# Altium PCB TSAL_REV2_2.PcbDoc
Units mil, origin at the board's own origin, x right, y up, seen from the top; angles counter-clockwise.
Board outline 2559.06 x 1377.95 mil, 2 copper layers (Top Layer, Bottom Layer); 30 components, 14 nets, 62 pads, 23 vias.
Unrouted connection lines stored in the file: 41.
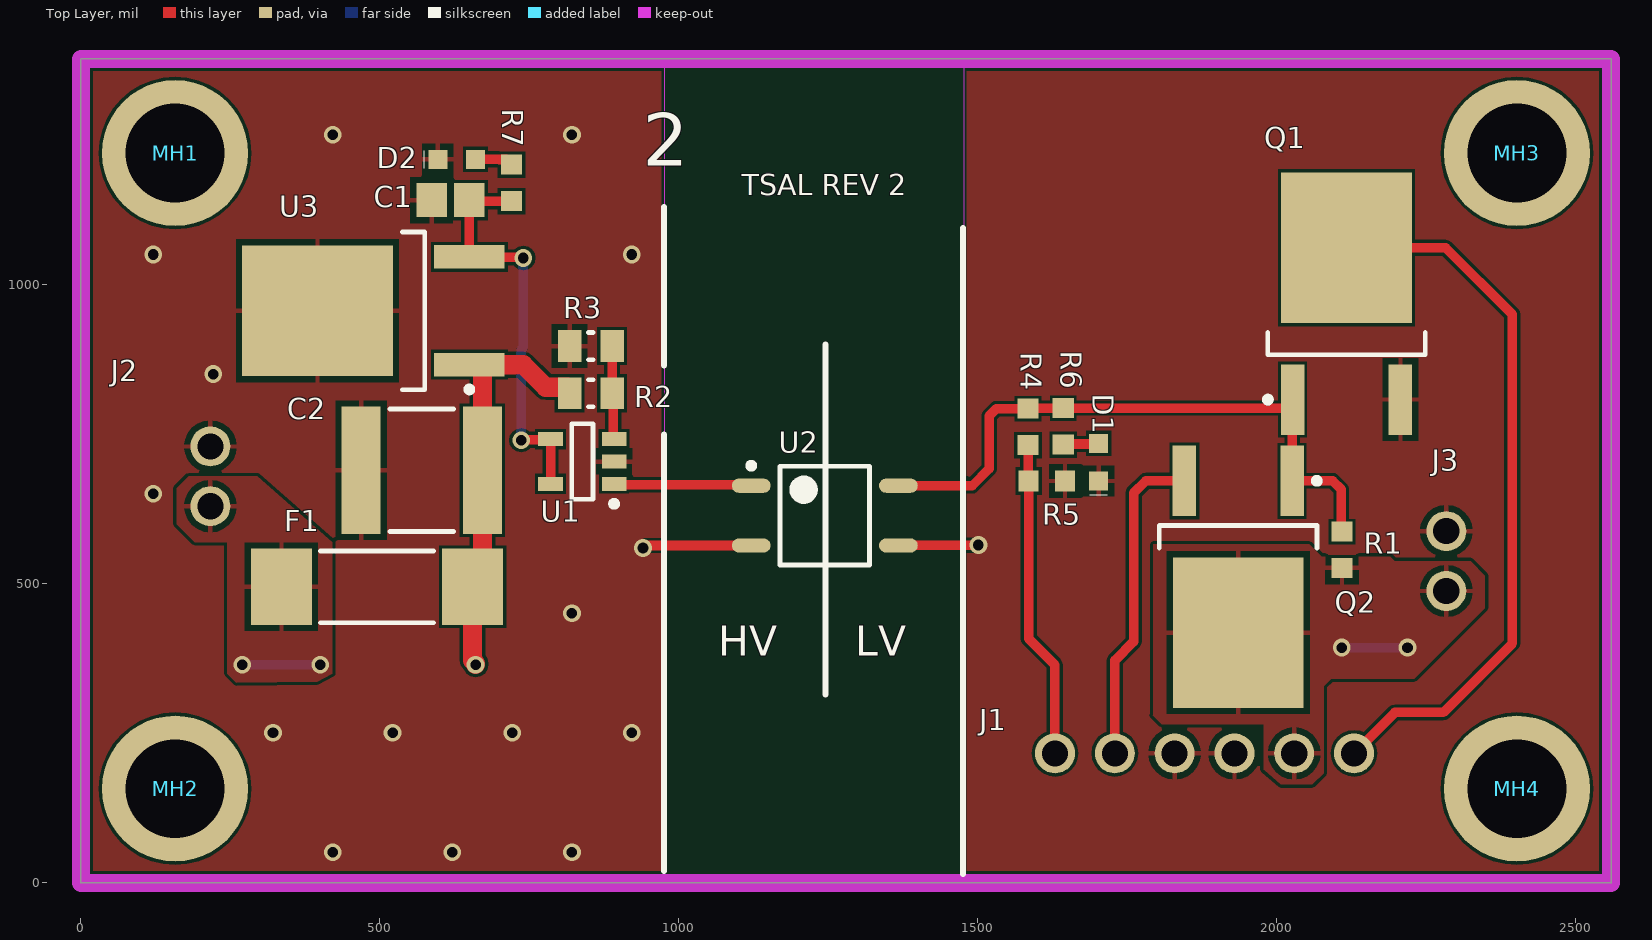
[diagram p0: Top Layer view]
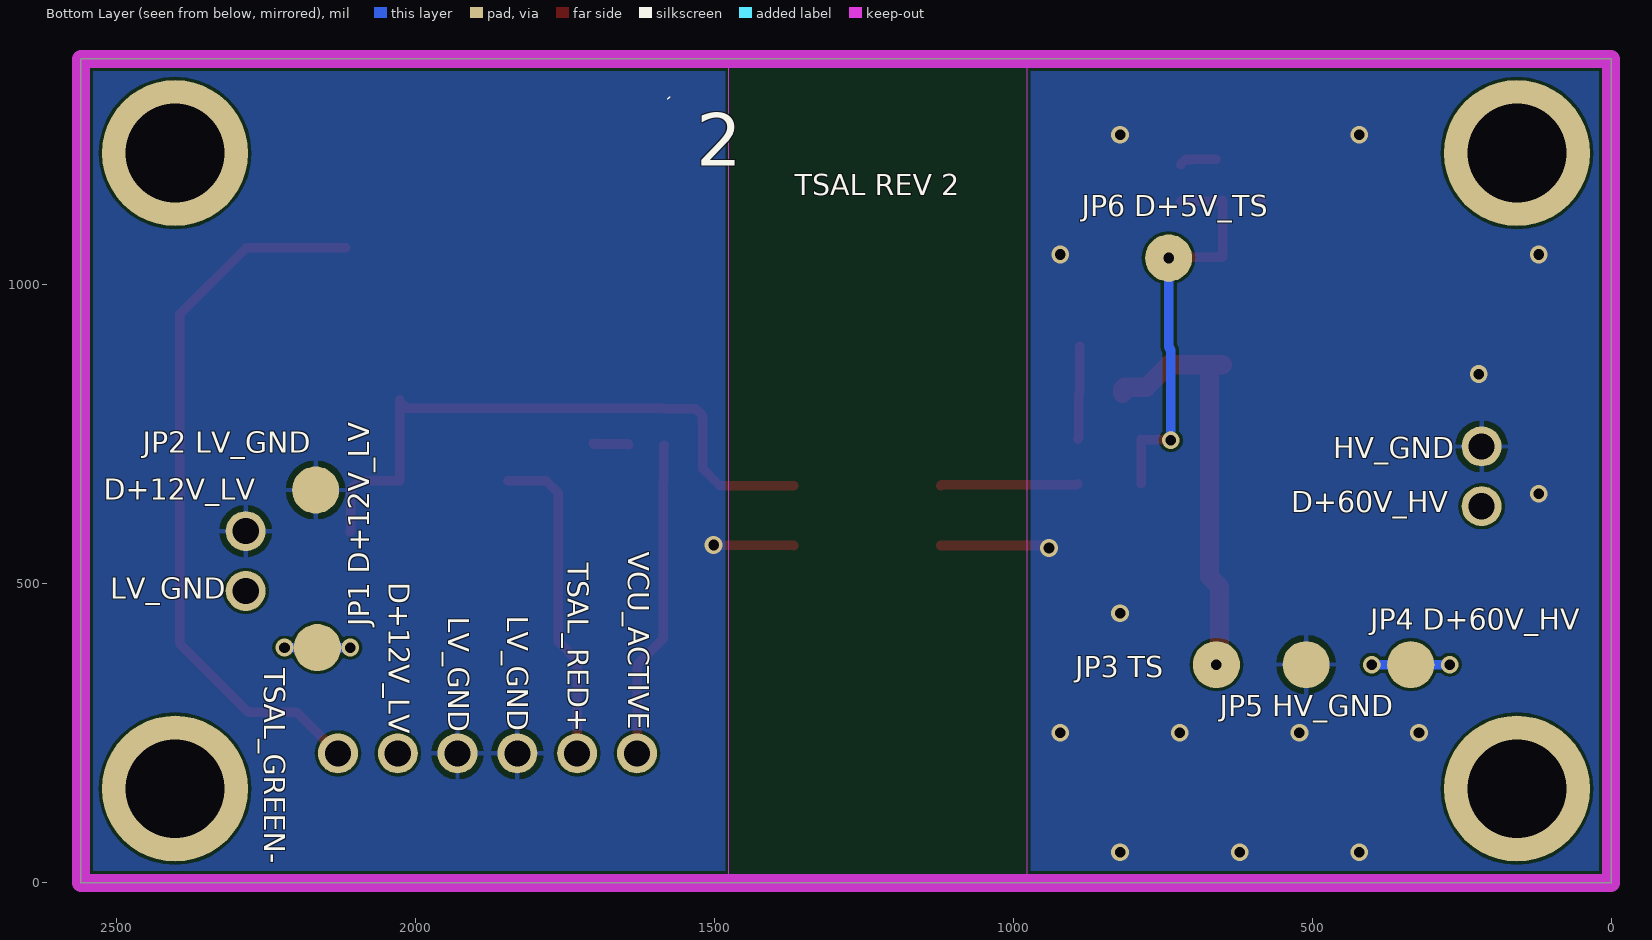
[diagram p1: Bottom Layer view, seen from below]
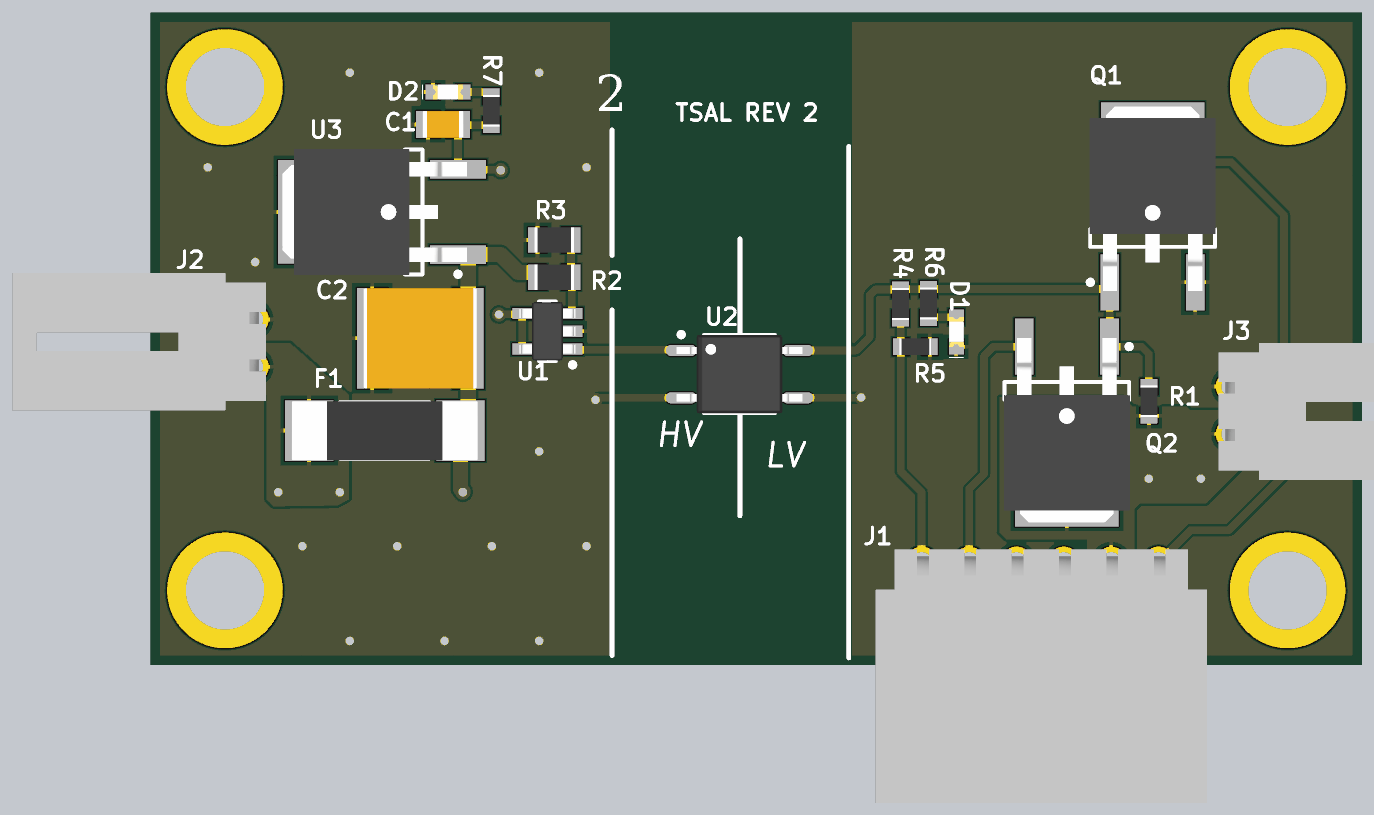
[diagram p2: 3D render of the assembled board from above, using the file's embedded part models]

## Layer stack, top to bottom
Top Solder: solder mask 0.4, Solder Resist, Dk 3.5
Top Layer: signal copper 1.4
Dielectric 1: dielectric 12.6, FR-4, Dk 4.8
Bottom Layer: signal copper 1.4
Bottom Solder: solder mask 0.4, Solder Resist, Dk 3.5

## Board outline
0,1377.95 0,0 2559.06,0 2559.06,1377.95

## Design rules (kind name [scope] priority, off if disabled: settings)
BoardOutlineClearance [All] p1: gap=7.87 ignorepadtopadclearanceinfootprint=FALSE
Clearance "Stitching HV_GND" [IsStitchingVia and InNet('HV_GND') vs (IsVia and (Not IsStitchingVia)) Or IsPad] p1: gap=5 ignorepadtopadclearanceinfootprint=FALSE
Clearance [All] p2: gap=5 ignorepadtopadclearanceinfootprint=FALSE except(7.87: Arc-SMDPad Track-SMDPad; 9.84: Arc-Hole Track-Hole SMDPad-Hole THPad-Hole Via-Hole Fill-Hole Poly-Hole Region-Hole Text-Hole; 10: Arc-Via Track-Via Via-Via; 12.99: Arc-THPad Track-THPad; 21.26: SMDPad-THPad THPad-THPad)
ComponentClearance [All] p1: gap=5 collisioncheckmode=3 verticalgap=5 showdistances=TRUE
DiffPairsRouting [All] p1: maxlimit=10 minlimit=5 mostfreqgap=5 toplayer_minwidth=5 toplayer_maxwidth=1000 toplayer_prefwidth=5 bottomlayer_minwidth=5 bottomlayer_maxwidth=1000 bottomlayer_prefwidth=5 maxuncoupledlength=500
Height [All] p1: minheight=0 maxheight=71497.94 prefheight=500
HoleSize [All] p1: absolutevalues=TRUE maxlimit=248.03 minlimit=11.81 maxpercent=80.000 minpercent=20.000
HoleToHoleClearance [All] p1: gap=9.84 allowstackedmicrovias=FALSE
MinimumAnnularRing [All] p1: minimumring=3
MinimumSolderMaskSliver [All] p1: minsoldermaskwidth=0
PlaneClearance [All] p1: clearance=5
PlaneConnect PlaneConnectPowerPads [InPadClass('PowerPads')] p1: planeconnectstyle=Direct reliefexpansion=20 reliefentries=4 reliefconductorwidth=10 reliefairgap=10
PlaneConnect [All] p2: pad.planeconnectstyle=Relief pad.reliefexpansion=11.81 pad.reliefentries=4 pad.reliefconductorwidth=10 pad.reliefairgap=5 via.planeconnectstyle=Direct via.reliefexpansion=11.81 via.reliefentries=4 via.reliefconductorwidth=5 via.reliefairgap=5
PolygonConnect PolygonConnectPowerPads [All vs (InPadClass('PowerPads'))] p1: connectstyle=Direct reliefconductorwidth=10 reliefentries=4 polygonreliefangle="90 Angle" airgapwidth=10
PolygonConnect [All] p2: thpad.connectstyle=Relief thpad.reliefconductorwidth=8 thpad.reliefentries=4 thpad.polygonreliefangle="90 Angle" thpad.airgapwidth=10 smdpad.connectstyle=Relief smdpad.reliefconductorwidth=8 smdpad.reliefentries=4 smdpad.polygonreliefangle="90 Angle" smdpad.airgapwidth=10 via.connectstyle=Direct via.reliefconductorwidth=8 via.reliefentries=4 via.polygonreliefangle="90 Angle" via.airgapwidth=10
RoutingVias [All] p1: holewidth=17.72 width=29.53 viastyle="Through Hole" minholewidth=11.81 minwidth=23.62 maxholewidth=23.62 maxwidth=259.84
SilkToSilkClearance [All] p1: silktosilkclearance=0
SilkToSolderMaskClearance [IsPad] p1: minsilkscreentomaskgap=5 clearancetoexposedcopper=TRUE
SolderMaskExpansion SolderMaskExpansion_Via [IsVia] p1: expansion=4 istentingtop=FALSE
SolderMaskExpansion [All] p2: expansion=2.95 istentingtop=FALSE
Width [All] p1: maxlimit=1000 minlimit=7.87 preferedwidth=16 minimp=50.000000 maximp=50.000000 favimp=50.000000
20 further rules are at their usual default settings.

## Classes and differential pairs
net class PWR: D+5V_TS
net class LV: D+12V_LV
net class HV: D+60V_HV TS
polygon class Top_Layer: D+HV_L01_P006

## Components (designator, comment, footprint, x,y, rotation, side; value= is the part's Value field where it differs from the comment)
C1 "22uF 10V" CAP-0805 618.11,1141.73 r0 top
C2 "2.2uF 450V" CAP-2220 570,690 r180 top
D1 "Green" LED-0603 1733.55,656.23 r90 top
D2 "Green" LED-0603 581.26,1178.5 r0 top
F1 "250V 800mA" Fuse-10x3 495.16,495 r0 top
J1 "WM4928-ND" 6PIN 1629.13,216.54 r0 top
J2 "WM4153-ND" 2PIN 216.54,729.92 r270 top
J3 "WM4153-ND" 2PIN 2283.46,488.19 r90 top
"JP1 D+12V_LV" "Testpoint2" TP2#1 2163.5,393.5 r180 bottom (schematic designator JP1)
"JP2 LV_GND" "Testpoint2" TP2#2 2166.5,657 r0 top (schematic designator JP2)
"JP3 TS" "Testpoint2" TP2#1 660,365 r180 bottom (schematic designator JP3)
"JP4 D+60V_HV" "Testpoint2" TP2#1 335,365 r180 bottom (schematic designator JP4)
"JP5 HV_GND" "Testpoint2" TP2#1 510,365 r180 bottom (schematic designator JP5)
"JP6 D+5V_TS" "Testpoint2" TP2#1 740,1045 r180 bottom (schematic designator JP6)
MH1 "MountingHole" MH4.2MM#1 185.04,1192.91 r0 top
MH2 "MountingHole" MH4.2MM#2 78.74,196.85 r0 top
MH3 "MountingHole" MH4.2MM#3 2401.57,1220.47 r0 top
MH4 "MountingHole" MH4.2MM#3 2401.57,157.48 r0 top
Q1 "IPD50N06S4L12ATMA2CT-ND" DPAK-TO252 2116.56,969.63 r90 top
Q2 "NTD2955T4GOSCT-ND" DPAK-TO252 1935.46,510.96 r270 top
R1 "20K 1%" RES-0603 2109,557.01 r270 top
R2 "110K" RES-0805 852.83,818.9 r180 top
R3 "10K 1%" RES-0805 852.83,897.64 r0 top
R4 "73.2K 1%" RES-0603 1583.94,762.53 r90 top
R5 "30K 1%" RES-0603 1615.44,671.98 r180 top
R6 "1K 1%" RES-0603 1643,763.51 r270 top
R7 "280R 1%" RES-0603 720,1170.51 r90 top
U1 "497-6777-1-ND" SOT-23-5 838.58,704.72 r180 top
U2 "516-1787-1-ND" 4-SSOP 1244.09,614.17 r0 top
U3 "NCV5501DT50RKGOSCT-ND" DPAK-TO252 488.19,956.69 r180 top

## Footprints (in the part's own frame and the unit in brackets; to place one, negate y for a bottom-side part, rotate by r counter-clockwise, add the part's x,y. Pads: shape width x height; smd on the part's side, far side on the other; paste and mask are expansions set on the pad)
2PIN [mm]
  round 1.7 hole 1.11: 1(0,0) 2(2.54,0)
  body extent -2.48,-12.89 4.88,0.7, height 7.06
4-SSOP [mm] "SOP, 4-Leads, Body 3.70x4.40mm, Pitch 2.54mm, IPC Medium Density"
  oval 1.65x0.6 smd: 1(-3.125,1.27) 2(-3.125,-1.27) 3(3.125,-1.27) 4(3.125,1.27)
  silkscreen extent -3.25,-2.1 1.9,2.24, body extent -3.37,-2.1 3.37,2.1, height 2.2
6PIN [mm]
  round 1.7 hole 1.11: 1(0,0) 2(2.54,0) 3(5.08,0) 4(7.62,0) 5(10.16,0) 6(12.7,0)
  body extent -2.48,-12.89 15.3,0.7, height 7.06
CAP-0805 [mm] "Chip Capacitor, 2-Leads, Body 2.00x1.25mm, IPC Medium Density"
  rect 1.3x1.45 smd: 1(-0.8,0) 2(0.8,0)
  body extent -1.1,-0.72 1.1,0.72, height 1.35
CAP-2220 [mm] "Chip Capacitor, 2-Leads, Body 5.70x5.00mm, IPC Medium Density"
  rect 1.65x5.4 smd: 1(-2.575,0) 2(2.575,0)
  silkscreen extent -1.35,-2.6 1.35,2.6, body extent -3.05,-2.7 3.05,2.7, height 3.1
DPAK-TO252 [mm] "D-PAK, 3-Pads, Body 6.20x6.73mm (max), IPC Medium Density"
  rect 3x1 smd: 1(-4.1,2.29) 3(-4.1,-2.29)
  rect 6.4x5.55 smd: 2(2.35,0)
  silkscreen extent -4.22,-3.35 -1.25,3.46, body extent -4.57,-3.37 5.33,3.37, height 2.38
Fuse-10x3 [mm] "Chip Inductor, 2-Leads, Body 9.80x3.10mm, IPC Medium Density"
  rect 2.59x3.24 smd: 1(-4.06,0) 2(4.06,0)
  silkscreen extent -2.4,-1.52 2.4,1.52, body extent -5,-1.6 5,1.6, height 3.2
LED-0603 [mm]
  rect 0.8x0.8 smd: 1(2,0.8) 2(0.4,0.8)
  silkscreen extent -0.18,0.43 -0.18,1.17, body extent 0.4,0.4 2,1.2, height 0.7
MH4.2MM#1 [mm] "Mounting Hole, 4.2mm"
  round 6.2 hole 4.2: 1(-0.7,0.7)
MH4.2MM#2 [mm] "Mounting Hole, 4.2mm"
  round 6.2 hole 4.2: 1(2,-1)
MH4.2MM#3 [mm] "Mounting Hole, 4.2mm"
  round 6.2 hole 4.2: 1(0,0)
RES-0603 [mm] "Chip Resistor, 2-Leads, Body 1.60x0.80mm, IPC Medium Density"
  rect 0.85x0.9 smd: 1(-0.775,0) 2(0.775,0)
  body extent -0.85,-0.45 0.85,0.45, height 0.55
RES-0805 [mm] "Chip Resistor, 2-Leads, Body 2.00x1.25mm, IPC Medium Density"
  rect 1x1.35 smd: 1(-0.9,0) 2(0.9,0)
  silkscreen extent -0.1,-0.58 0.1,0.58, body extent -1.05,-0.67 1.05,0.67, height 0.6
SOT-23-5 [mm] "SOT23, 5-Leads, Body 3.00x2.75mm, Pitch 0.95mm, IPC Medium Density"
  rect 1.05x0.6 smd: 1(-1.35,0.95) 2(-1.35,0) 3(-1.35,-0.95) 4(1.35,-0.95) 5(1.35,0.95)
  silkscreen extent -1.48,-1.6 0.45,1.92, body extent -1.5,-1.58 1.5,1.58, height 1.1
TP2#1 [mm]
  round 2 smd: 1(0,0)
TP2#2 [mm]
  round 2 smd far side: 1(0,0)

## Part data
C1: library part 0805-22uF-10V, "CAP CER 22UF 10V X5R 0805", Capacitance=22uF, Case Code (Imperial)=0805, Case Code (Metric)=2012, Dielectric=X5R, Dielectric Material=Ceramic, Manufacturer=KEMET, Manufacturer Part Number=C0805C226M8PACTU, Max Operating Temperature=85°C, Min Operating Temperature=-55°C, Supplier Part Number 1=399-12069-6-ND, Tolerance=20%, Voltage=10V, Case/Package=0805, ComponentLink1Description=http://www.farnell.com/datasheets/2746360.pdf?src-supplier=Newark, ComponentLink1URL=http://www.farnell.com/datasheets/2746360.pdf?src-supplier=Newark, ComponentLink2Description=http://www.farnell.com/datasheets/2746360.pdf?src-supplier=Farnell, ComponentLink2URL=http://www.farnell.com/datasheets/2746360.pdf?src-supplier=Farnell, ComponentLink3Description=http://www.farnell.com/datasheets/2746360.pdf?src-supplier=Element14, ComponentLink3URL=http://www.farnell.com/datasheets/2746360.pdf?src-supplier=Element14, ComponentLink4Description=https://api.kemet.com/component-edge/download/datasheet/C0805C226M8PAC7800.pdf?src-supplier=Digi-Key, ComponentLink4URL=https://api.kemet.com/component-edge/download/datasheet/C0805C226M8PAC7800.pdf?src-supplier=Digi-Key, ComponentLink5Description=http://www.alliedelec.com/m/d/f3c02ddb98afa3dd1adcb801109671e9.pdf?src-supplier=Allied+Electronics, ComponentLink5URL=http://www.alliedelec.com/m/d/f3c02ddb98afa3dd1adcb801109671e9.pdf?src-supplier=Allied+Electronics, Depth=1.25mm, Dissipation Factor=10%, Height=1.25mm, Lead Free="Lead Free", Length=0.079inch, Mount="Surface Mount", Packaging="Tape and Reel", Pricing 1="1=0.47, 10=0.331, 100=0.2179, 500=0.16142, 1000=0.1372 (USD)", Stock 1=29030, Supplier 1=Digi-Key, Termination=Solder, Thickness=0.055inch, Voltage Rating=10V, Voltage Rating (DC)=10V, Width=0.049inch
C2: library part 2220-2.2uF-450V, "CAP CER 2.2UF 450V X6S 2220", Capacitance=2.2uF, Case Code (Imperial)=2220, Case Code (Metric)=5750, Dielectric=X6S, Manufacturer=TDK, Manufacturer Part Number=C5750X6S2W225K250KA, Max Operating Temperature=105°C, Min Operating Temperature=-55°C, Package Quantity=1, Supplier Part Number 1=445-7781-6-ND, Tolerance=10%, Voltage Rating=450V, Case/Package=2220, ComponentLink1Description=http://product.tdk.com/capacitor/mlcc/en/documents/mlcc_commercial_midvoltage_en.pdf?src-supplier=Avnet+Europe, ComponentLink1URL=http://product.tdk.com/capacitor/mlcc/en/documents/mlcc_commercial_midvoltage_en.pdf?src-supplier=Avnet+Europe, Depth=5mm, Height=2.5mm, Lead Free="Lead Free", Length=5.7mm, Mount="Surface Mount", Packaging="Tape and Reel", Pricing 1="1=3.66, 10=2.957, 100=2.258 (USD)", Radiation Hardening=No, REACH SVHC="No SVHC", Stock 1=8149, Supplier 1=Digi-Key, Termination=SMD/SMT, Thickness=0.11inch, Voltage Rating (DC)=450V, Weight=0.016932oz, Width=0.197inch
D1 D2: library part LED-Green, "LED GREEN CLEAR 0603 SMD", Case Code (Imperial)=0603, Case Code (Metric)=1608, Forward Current=30mA, Forward Voltage=2V, Manufacturer="Wurth Electronics", Manufacturer Part Number=150060VS75000, Max Operating Temperature=85°C, Min Operating Temperature=-40°C, Package Quantity=1, Supplier Part Number 1=732-4980-1-ND, Test Current=20mA, Case/Package=0603, Color=Green, ComponentLink1Description=https://katalog.we-online.de/led/datasheet/150060VS75000.pdf?src-supplier=Digi-Key, ComponentLink1URL=https://katalog.we-online.de/led/datasheet/150060VS75000.pdf?src-supplier=Digi-Key, Dominant Wavelength=570nm, Height=0.7mm, Length=1.6mm, Lens Style=Clear,Rectangular, Luminous Intensity=40mcd, Mount="Surface Mount", Number of Pins=2, Packaging="Tape and Reel", Pricing 1="1=0.14, 50=0.133, 100=0.114, 500=0.099 (USD)", REACH SVHC=Unknown, Stock 1=118118, Supplier 1=Digi-Key, Viewing Angle=140°, Wavelength=570nm, Width=0.8mm
F1: library part "Fuse 250V-0.8A", "FUSE SMT 3912 FAST 250V 800MA", Case/Package=SMD/SMT, Current Rating=800mA, DC Cold Resistance=380mR, Manufacturer=Bel, Manufacturer Part Number=0678D0800-02, Max Operating Temperature=125°C, Min Operating Temperature=-55°C, Voltage Rating (AC)=350V, Voltage Rating (DC)=250V, Approvals=cURus, ComponentLink1Description=https://media.digikey.com/pdf/Data%20Sheets/Bel%20Fuse%20PDFs/0678D_Series.pdf?src-supplier=Digi-Key, ComponentLink1URL=https://media.digikey.com/pdf/Data%20Sheets/Bel%20Fuse%20PDFs/0678D_Series.pdf?src-supplier=Digi-Key, Fuse Type="Board Mount (Cartridge Style Excluded)", Mount="Surface Mount", Packaging="Tape and Reel", Pricing 1="1=0.91, 5=0.884, 10=0.827, 50=0.684, 100=0.57, 250=0.55576, 500=0.47026, 1000=0.41325 (USD)", Stock 1=1992, Supplier 1=Digi-Key
J1: library part 6PIN, "CONN HEADER R/A 6POS 2.54MM", Color=Black, Contact Resistance=30mR, Current Rating=3A, Flammability Rating="UL94 V-0", Insulation Resistance=1GR, Manufacturer=Molex, Manufacturer Part Number=70553-0040, Max Operating Temperature=105°C, Max Voltage Rating (AC)=250V, Min Operating Temperature=-40°C, Package Quantity=1200, ComponentLink1Description=http://uk.rs-online.com/webdocs/13c4/0900766b813c4993.pdf?src-supplier=RSComponents, ComponentLink1URL=http://uk.rs-online.com/webdocs/13c4/0900766b813c4993.pdf?src-supplier=RSComponents, ComponentLink2Description=http://www.molex.com/webdocs/datasheets/pdf/en-us/0705530040_PCB_HEADERS.pdf?src-supplier=Avnet+Europe, ComponentLink2URL=http://www.molex.com/webdocs/datasheets/pdf/en-us/0705530040_PCB_HEADERS.pdf?src-supplier=Avnet+Europe, ComponentLink3Description=http://www.farnell.com/datasheets/1844551.pdf?src-supplier=Farnell, ComponentLink3URL=http://www.farnell.com/datasheets/1844551.pdf?src-supplier=Farnell, ComponentLink4Description=http://www.mouser.com/ds/2/276/0705530040_PCB_HEADERS-172948.pdf?src-supplier=Mouser, ComponentLink4URL=http://www.mouser.com/ds/2/276/0705530040_PCB_HEADERS-172948.pdf?src-supplier=Mouser, ComponentLink5Description=http://www.farnell.com/cad/655744.pdf?src-supplier=Element14, ComponentLink5URL=http://www.farnell.com/cad/655744.pdf?src-supplier=Element14, ComponentLink6Description=http://www.jameco.com/Jameco/Products/ProdDS/1302975.pdf?src-supplier=Jameco, ComponentLink6URL=http://www.jameco.com/Jameco/Products/ProdDS/1302975.pdf?src-supplier=Jameco, Contact Material="Bronze,Copper Alloy,Brass", Contact Plating=Tin, Depth=13.59mm, ELV=Compliant, Gender=Male, Glow Wire Compliant=Non-compliant, Height=6.99mm, Housing Color=Black, Housing Material=Thermoplastic, Lead Free="Lead Free", Length=17.79mm, Material=Brass, Max Current Rating=3A, Mount="Through Hole", Number of Circuits=6, Number of Contacts=6, Number of Positions=6, Number of Rows=1, Orientation="Right Angle", Packaging=Rail/Tube, Pitch=2.54mm, Pricing 1="1=1.58, 10=1.434, 100=1.2289, 500=1.0241, 1000=0.8778, 5000=0.77832, 10000=0.76076 (USD)", Radiation Hardening=No, REACH SVHC=Unknown, Stock 1=2212, Supplier 1=Digi-Key, Supplier Part Number 1=WM4928-ND, Termination=Solder, Voltage Rating=250V, Voltage Rating (DC)=250V
J2 J3: library part 2PIN, "CONN HEADER R/A 2POS 2.54MM", Color=Black, Contact Resistance=30mR, Manufacturer=Molex, Manufacturer Part Number=0705530106, Max Operating Temperature=105°C, Min Operating Temperature=-40°C, ComponentLink1Description=http://www.molex.com/webdocs/datasheets/pdf/en-us/0705530106_PCB_HEADERS.pdf?src-supplier=Avnet+Asia, ComponentLink1URL=http://www.molex.com/webdocs/datasheets/pdf/en-us/0705530106_PCB_HEADERS.pdf?src-supplier=Avnet+Asia, ComponentLink2Description=https://www.molex.com/pdm_docs/ps/PS-70400.pdf?src-supplier=Digi-Key, ComponentLink2URL=https://www.molex.com/pdm_docs/ps/PS-70400.pdf?src-supplier=Digi-Key, Connector Type="Male Pin", Contact Material=Bronze, Contact Mating Length=0.24inch, Contact Plating=Gold, Depth=13.59mm, Housing Color=Black, Housing Material=Polyester, Length=7.37mm, Mount="Through Hole", Number of Contacts=2, Number of Positions=2, Number of Rows=1, Orientation="Right Angle", Packaging=Rail/Tube, Pitch=2.54mm, Pricing 1="1=1.38, 10=1.25, 100=1.071, 500=0.8925, 1000=0.765, 5000=0.6783, 10000=0.663 (USD)", Stock 1=2224, Supplier 1=Digi-Key, Supplier Part Number 1=WM4153-ND, Termination=Solder
"JP1 D+12V_LV" "JP2 LV_GND" "JP3 TS" "JP4 D+60V_HV" "JP5 HV_GND" "JP6 D+5V_TS": "Single layer pad TP"
MH1 MH2 MH3 MH4: library part MH4.2mm, "Mounting hole, 4.2mm", Case=TH
Q1: library part N-FET-60V-50A, "MOSFET N-CH 60V 50A TO252-3", Case/Package=TO-252-3, Continuous Drain Current (ID)=50A, Drain to Source Voltage (Vdss)=60V, Gate to Source Voltage (Vgs)=16V, Input Capacitance=2.89nF, Manufacturer=Infineon, Manufacturer Part Number=IPD50N06S4L12ATMA2, Max Operating Temperature=175°C, Max Power Dissipation=50W, Min Operating Temperature=-55°C, Supplier Part Number 1=IPD50N06S4L12ATMA2DKR-ND, Fall Time=5ns, Max Dual Supply Voltage=60V, Mount="Surface Mount", Number of Pins=3, Packaging="Tape and Reel", Pricing 1="1=0.92, 10=0.806, 25=0.7572, 100=0.5497, 250=0.53012, 500=0.45928, 1000=0.39088 (USD)", Rds On Max=12mR, Rise Time=2ns, Stock 1=3187, Supplier 1=Digi-Key, Turn-Off Delay Time=25ns, Turn-On Delay Time=6ns
Q2: library part P-FET-60V-12A, "MOSFET P-CH 60V 12A DPAK", Case/Package=DPAK, Continuous Drain Current (ID)=12A, Current Rating=-12A, Drain to Source Breakdown Voltage=-60V, Drain to Source Resistance=155mR, Gate to Source Voltage (Vgs)=20V, Input Capacitance=750pF, Manufacturer="ON Semiconductor", Manufacturer Part Number=NTD2955T4G, Max Operating Temperature=175°C, Max Power Dissipation=55W, Min Operating Temperature=-55°C, On-State Resistance=180mR, Package Quantity=1, Supplier Part Number 1=NTD2955T4GOSDKR-ND, Threshold Voltage=-2.8V, ComponentLink1Description=http://www.onsemi.com/pub/Collateral/NTD2955-D.PDF?src-supplier=Avnet, ComponentLink1URL=http://www.onsemi.com/pub/Collateral/NTD2955-D.PDF?src-supplier=Avnet, ComponentLink2Description=http://www.onsemi.com/pub/Collateral/NTD2955-D.PDF?src-supplier=Avnet+Europe, ComponentLink2URL=http://www.onsemi.com/pub/Collateral/NTD2955-D.PDF?src-supplier=Avnet+Europe, ComponentLink3Description=http://www.onsemi.com/pub_link/Collateral/NTD2955-D.PDF?src-supplier=Element14, ComponentLink3URL=http://www.onsemi.com/pub_link/Collateral/NTD2955-D.PDF?src-supplier=Element14, ComponentLink4Description=http://www.onsemi.com/pub/Collateral/NTD2955-D.PDF?src-supplier=Digi-Key, ComponentLink4URL=http://www.onsemi.com/pub/Collateral/NTD2955-D.PDF?src-supplier=Digi-Key, ComponentLink5Description=http://www.jameco.com/Jameco/Products/ProdDS/1178118.pdf?src-supplier=Jameco, ComponentLink5URL=http://www.jameco.com/Jameco/Products/ProdDS/1178118.pdf?src-supplier=Jameco, Contact Plating=Tin,Matte, Drain to Source Voltage (Vdss)=-60V, Element Configuration=Single, Fall Time=48ns, Height=2.38mm, Lead Free="Lead Free", Length=6.73mm, Nominal Vgs=-2.8V, Number of Channels=1, Number of Elements=1, Number of Pins=3, Packaging="Tape and Reel", Power Dissipation=55W, Pricing 1="1=0.76, 10=0.672, 25=0.6316, 100=0.4583, 250=0.44204, 500=0.38296, 1000=0.32592 (USD)", Radiation Hardening=No, Rds On Max=180mR, REACH SVHC="No SVHC", Rise Time=45ns, Stock 1=9993, Supplier 1=Digi-Key, Turn-Off Delay Time=26ns, Turn-On Delay Time=10ns, Voltage Rating (DC)=-60V, Width=6.22mm
R1: library part 0603-20KR, "RES SMD 20K OHM 1% 1/10W 0603", Case Code (Imperial)=0603, Case Code (Metric)=1608, Manufacturer=Yageo, Manufacturer Part Number=RC0603FR-0720KL, Max Operating Temperature=155°C, Max Power Dissipation=100mW, Min Operating Temperature=-55°C, Package Quantity=1, Resistance=20kR, Supplier Part Number 1=311-20.0KHRDKR-ND, Temperature Coefficient=100ppm/°C, Tolerance=1%, Voltage Rating=50V, Case/Package=0603, ComponentLink1Description=http://documents.rs-components.com/techlib://itc_doclist_GB.htm?stockno=5050145&src-supplier=RSComponents, ComponentLink1URL=http://documents.rs-components.com/techlib://itc_doclist_GB.htm?stockno=5050145&src-supplier=RSComponents, ComponentLink2Description=http://www.farnell.com/datasheets/2167052.pdf?src-supplier=Element14, ComponentLink2URL=http://www.farnell.com/datasheets/2167052.pdf?src-supplier=Element14, ComponentLink3Description=http://www.yageo.com/documents/recent/PYu-RC_Group_51_RoHS_L_10.pdf?src-supplier=Digi-Key, ComponentLink3URL=http://www.yageo.com/documents/recent/PYu-RC_Group_51_RoHS_L_10.pdf?src-supplier=Digi-Key, Composition="Thick Film", Depth=0.8mm, Features="Moisture Resistant", Height=0.022inch, Lead Free="Lead Free", Length=0.063inch, Military Standard=Not, Number of Pins=2, Number of Terminations=2, Packaging="Tape and Reel", Power Rating=100mW, Pricing 1="1=0.1, 10=0.023, 100=0.0094, 1000=0.00421, 2500=0.00366 (USD)", REACH SVHC="No SVHC", Stock 1=3611201, Supplier 1=Digi-Key, Termination=SMD/SMT, Voltage Rating (DC)=50V, Width=0.031inch
R2: library part 0805-110KR, "RES SMD 110K OHM 1% 1/8W 0805", Case Code (Imperial)=0805, Case Code (Metric)=2012, Manufacturer=Yageo, Manufacturer Part Number=RC0805FR-07110KL, Max Operating Temperature=155°C, Max Power Dissipation=125mW, Min Operating Temperature=-55°C, Package Quantity=5000, Resistance=110kR, Supplier Part Number 1=311-110KCRDKR-ND, Temperature Coefficient=100ppm/°C, Tolerance=1%, Voltage Rating=150V, Case/Package=0805, ComponentLink1Description=http://www.yageo.ru/pdf/RC0805.pdf?src-supplier=Future+Electronics, ComponentLink1URL=http://www.yageo.ru/pdf/RC0805.pdf?src-supplier=Future+Electronics, ComponentLink2Description=http://www.mouser.com/ds/2/447/Yageo_08112016_RC0805-968729.pdf?src-supplier=Mouser, ComponentLink2URL=http://www.mouser.com/ds/2/447/Yageo_08112016_RC0805-968729.pdf?src-supplier=Mouser, ComponentLink3Description=http://www.yageo.com/documents/recent/PYu-RC_Group_51_RoHS_L_9.pdf?src-supplier=Digi-Key, ComponentLink3URL=http://www.yageo.com/documents/recent/PYu-RC_Group_51_RoHS_L_9.pdf?src-supplier=Digi-Key, ComponentLink4Description=http://www.yageo.com/documents/recent/PYu-RC_Group_51_RoHS_L_10.pdf?src-supplier=Digi-Key, ComponentLink4URL=http://www.yageo.com/documents/recent/PYu-RC_Group_51_RoHS_L_10.pdf?src-supplier=Digi-Key, ComponentLink5Description=http://documents.rs-components.com/techlib://itc_doclist_GB.htm?stockno=6185191&src-supplier=RSComponents, ComponentLink5URL=http://documents.rs-components.com/techlib://itc_doclist_GB.htm?stockno=6185191&src-supplier=RSComponents, Composition="Thick Film", Depth=1.25mm, Features="Moisture Resistant", Height=0.024inch, Lead Free="Lead Free", Length=2mm, Military Standard=Not, Mount="Surface Mount", Number of Terminations=2, Packaging="Tape and Reel", Power Rating=125mW, Pricing 1="1=0.1, 10=0.04, 100=0.0163, 1000=0.00731, 2500=0.00635 (USD)", Stock 1=344300, Supplier 1=Digi-Key, Termination=SMD/SMT, Voltage Rating (DC)=150V, Width=0.049inch, Working Voltage=150V
R3: library part 0805-10KR, "RES SMD 10K OHM 1% 1/8W 0805", Case Code (Imperial)=0805, Case Code (Metric)=2012, Manufacturer=Yageo, Manufacturer Part Number=RC0805FR-0710KL, Max Operating Temperature=155°C, Max Power Dissipation=125mW, Min Operating Temperature=-55°C, Package Quantity=1, Resistance=10kR, Supplier Part Number 1=311-10.0KCRCT-ND, Temperature Coefficient=100ppm/°C, Tolerance=1%, Voltage Rating=150V, Case/Package=0805, ComponentLink1Description=http://www.yageo.com/documents/recent/PYu-RC_Group_51_RoHS_L_9.pdf?src-supplier=Mouser, ComponentLink1URL=http://www.yageo.com/documents/recent/PYu-RC_Group_51_RoHS_L_9.pdf?src-supplier=Mouser, ComponentLink2Description=http://www.farnell.com/datasheets/2167052.pdf?src-supplier=Element14, ComponentLink2URL=http://www.farnell.com/datasheets/2167052.pdf?src-supplier=Element14, ComponentLink3Description=http://www.yageo.com/documents/recent/PYu-RC_Group_51_RoHS_L_10.pdf?src-supplier=Digi-Key, ComponentLink3URL=http://www.yageo.com/documents/recent/PYu-RC_Group_51_RoHS_L_10.pdf?src-supplier=Digi-Key, ComponentLink4Description=http://www.yageo.ru/pdf/RC0805.pdf?src-supplier=Future+Electronics, ComponentLink4URL=http://www.yageo.ru/pdf/RC0805.pdf?src-supplier=Future+Electronics, Composition="Thick Film", Depth=1.25mm, Features="Moisture Resistant", Height=0.024inch, Lead Free="Lead Free", Length=2mm, Military Standard=Not, Number of Terminations=2, Packaging="Tape and Reel", Power Rating=125mW, Pricing 1="1=0.1, 10=0.04, 100=0.0163, 1000=0.00731, 2500=0.00635 (USD)", REACH SVHC=Unknown, Stock 1=26112993, Supplier 1=Digi-Key, Termination=SMD/SMT, Width=0.049inch
R4: library part 0603-73.2KR, "RES SMD 73.2K OHM 1% 1/10W 0603", Case Code (Imperial)=0603, Case Code (Metric)=1608, Manufacturer=Yageo, Manufacturer Part Number=RC0603FR-0773K2L, Max Operating Temperature=155°C, Min Operating Temperature=-55°C, Power Rating=100mW, Resistance=73.2kR, Supplier Part Number 1=311-73.2KHRDKR-ND, Temperature Coefficient=100ppm/°C, Tolerance=1%, Voltage Rating=50V, Case/Package=0603, ComponentLink1Description=http://www.yageo.com/documents/recent/PYu-RC0603_51_RoHS_L_4.pdf?src-supplier=Avnet, ComponentLink1URL=http://www.yageo.com/documents/recent/PYu-RC0603_51_RoHS_L_4.pdf?src-supplier=Avnet, ComponentLink2Description=http://www.yageo.com/documents/recent/PYu-RC0603_51_RoHS_L_4.pdf?src-supplier=Avnet+Europe, ComponentLink2URL=http://www.yageo.com/documents/recent/PYu-RC0603_51_RoHS_L_4.pdf?src-supplier=Avnet+Europe, Composition="Thick Film", Contact Plating=Tin,Matte, Depth=0.8mm, Height=0.45mm, Lead Free="Lead Free", Length=1.6mm, Military Standard=Not, Packaging="Tape and Reel", Pricing 1="1=0.1, 10=0.023, 100=0.0094, 1000=0.00421, 2500=0.00366 (USD)", Stock 1=696637, Supplier 1=Digi-Key, Termination=SMD/SMT, Voltage Rating (DC)=50V, Width=0.8mm
R5: library part 0603-30KR, "RES SMD 30K OHM 1% 1/10W 0603", Case Code (Imperial)=0603, Case Code (Metric)=1608, Manufacturer=Yageo, Manufacturer Part Number=RC0603FR-0730KL, Max Operating Temperature=155°C, Min Operating Temperature=-55°C, Package Quantity=5000, Power Rating=100mW, Resistance=30kR, Supplier Part Number 1=311-30.0KHRDKR-ND, Temperature Coefficient=100ppm/°C, Tolerance=1%, Voltage Rating=50V, Case/Package=0603, ComponentLink1Description=http://www.mouser.com/catalog/specsheets/RC0603.pdf?src-supplier=Mouser, ComponentLink1URL=http://www.mouser.com/catalog/specsheets/RC0603.pdf?src-supplier=Mouser, ComponentLink2Description=http://www.farnell.com/datasheets/2167052.pdf?src-supplier=Element14, ComponentLink2URL=http://www.farnell.com/datasheets/2167052.pdf?src-supplier=Element14, Composition="Thick Film", Depth=0.8mm, Height=0.45mm, Lead Free="Lead Free", Length=1.6mm, Military Standard=Not, Number of Pins=2, Packaging="Tape and Reel", Pricing 1="1=0.1, 10=0.023, 100=0.0094, 1000=0.00421, 2500=0.00366 (USD)", REACH SVHC=Unknown, Stock 1=1047616, Supplier 1=Digi-Key, Termination=SMD/SMT, Voltage Rating (DC)=50V, Width=0.8mm
R6: library part 0603-1KR, "RES SMD 1K OHM 1% 1/10W 0603", Case Code (Imperial)=0603, Case Code (Metric)=1608, Manufacturer="Vishay Dale", Manufacturer Part Number=CRCW06031K00FKEA, Max Operating Temperature=155°C, Max Power Dissipation=100mW, Min Operating Temperature=-55°C, Package Quantity=10, Resistance=1kR, Supplier Part Number 1=541-1.00KHCT-ND, Temperature Coefficient=100ppm/°C, Tolerance=1%, Voltage Rating=75V, Case/Package=0603, ComponentLink1Description=http://www.vishay.com/docs/20035/dcrcwe3.pdf?src-supplier=Digi-Key, ComponentLink1URL=http://www.vishay.com/docs/20035/dcrcwe3.pdf?src-supplier=Digi-Key, ComponentLink2Description=http://uk.rs-online.com/webdocs/0d98/0900766b80d98afc.pdf?src-supplier=RSComponents, ComponentLink2URL=http://uk.rs-online.com/webdocs/0d98/0900766b80d98afc.pdf?src-supplier=RSComponents, ComponentLink3Description=http://www.vishay.com/docs/20035/dcrcwe3.pdf?src-supplier=Avnet, ComponentLink3URL=http://www.vishay.com/docs/20035/dcrcwe3.pdf?src-supplier=Avnet, ComponentLink4Description=http://www.vishay.com/docs/20035/dcrcwe3.pdf?src-supplier=Avnet+Asia, ComponentLink4URL=http://www.vishay.com/docs/20035/dcrcwe3.pdf?src-supplier=Avnet+Asia, ComponentLink5Description=http://www.farnell.com/datasheets/2310790.pdf?src-supplier=Element14, ComponentLink5URL=http://www.farnell.com/datasheets/2310790.pdf?src-supplier=Element14, ComponentLink6Description=https://www.distrelec.biz/Web/Downloads/a_/en/flD-CRCW-e3_data_en.pdf?mime=application%2Fpdf&src-supplier=Distrelec, ComponentLink6URL=https://www.distrelec.biz/Web/Downloads/a_/en/flD-CRCW-e3_data_en.pdf?mime=application%2Fpdf&src-supplier=Distrelec, ComponentLink7Description=http://www.vishay.com/docs/20035/dcrcwe3.pdf?src-supplier=Future+Electronics, ComponentLink7URL=http://www.vishay.com/docs/20035/dcrcwe3.pdf?src-supplier=Future+Electronics, ComponentLink8Description=http://www.vishay.com/docs/20035/dcrcwe3.pdf?src-supplier=Avnet+Europe, ComponentLink8URL=http://www.vishay.com/docs/20035/dcrcwe3.pdf?src-supplier=Avnet+Europe, Composition="Thick Film", Contact Plating=Tin, Depth=0.85mm, Features="Automotive AEC-Q200", Height=0.45mm, Lead Free="Lead Free", Length=1.55mm, Military Standard=Not, Mount="Surface Mount", Number of Pins=2, Number of Terminations=2, Packaging="Tape and Reel", Power Rating=100mW, Pricing 1="1=0.1, 10=0.034, 100=0.0139, 1000=0.00623, 2500=0.0054 (USD)", Radiation Hardening=No, REACH SVHC=Unknown, Stock 1=671453, Supplier 1=Digi-Key, Termination=SMD/SMT, Voltage Rating (DC)=75V, Weight=7.1E-05oz, Width=0.033inch
R7: library part 0603-280R, "RES SMD 280 OHM 1% 1/10W 0603", Case Code (Imperial)=0603, Case Code (Metric)=1608, Manufacturer=Yageo, Manufacturer Part Number=RC0603FR-07280RL, Max Operating Temperature=155°C, Max Power Dissipation=100mW, Min Operating Temperature=-55°C, Package Quantity=1, Resistance=280R, Supplier Part Number 1=311-280HRDKR-ND, Temperature Coefficient=100ppm/°C, Tolerance=1%, Voltage Rating=50V, Case/Package=0603, ComponentLink1Description=http://www.yageo.com/documents/recent/PYu-RC_Group_51_RoHS_L_9.pdf?src-supplier=Digi-Key, ComponentLink1URL=http://www.yageo.com/documents/recent/PYu-RC_Group_51_RoHS_L_9.pdf?src-supplier=Digi-Key, ComponentLink2Description=http://www.mouser.com/catalog/specsheets/RC0603.pdf?src-supplier=Mouser, ComponentLink2URL=http://www.mouser.com/catalog/specsheets/RC0603.pdf?src-supplier=Mouser, Composition="Thick Film", Depth=0.8mm, Features="Moisture Resistant", Height=0.022inch, Lead Free="Lead Free", Length=1.6mm, Military Standard=Not, Number of Terminations=2, Packaging="Tape and Reel", Power Rating=100mW, Pricing 1="1=0.1, 10=0.023, 100=0.0094, 1000=0.00421, 2500=0.00366 (USD)", Stock 1=125324, Supplier 1=Digi-Key, Termination=SMD/SMT, Voltage Rating (DC)=50V, Width=0.031inch
U1: library part Compare-TS861ILT, "IC COMPARATOR R-R MCRPWR SOT23-5", Case/Package=SOT-23, Input Bias Current=300pA, Input Offset Voltage (Vos)=15mV, Manufacturer=STMicroelectronics, Manufacturer Part Number=TS861ILT, Max Operating Temperature=85°C, Max Power Dissipation=500mW, Max Supply Current=12uA, Max Supply Voltage=10V, Min Operating Temperature=-40°C, Min Supply Voltage=2.7V, Nominal Supply Current=14uA, Output Current=5mA, Package Quantity=3000, Power Supply Rejection Ratio (PSRR)=80dB, Quiescent Current=16uA, Supplier Part Number 1=497-6777-6-ND, Voltage Gain=240dB, Common Mode Rejection Ratio=70dB, ComponentLink1Description=http://www.farnell.com/datasheets/1690531.pdf?src-supplier=Element14, ComponentLink1URL=http://www.farnell.com/datasheets/1690531.pdf?src-supplier=Element14, ComponentLink2Description=http://www.st.com/content/ccc/resource/technical/document/datasheet/dd/d1/7d/d5/d5/ce/49/c5/CD00001705.pdf/files/CD00001705.pdf/jcr:content/translations/en.CD00001705.pdf?src-supplier=Digi-Key, ComponentLink2URL=http://www.st.com/content/ccc/resource/technical/document/datasheet/dd/d1/7d/d5/d5/ce/49/c5/CD00001705.pdf/files/CD00001705.pdf/jcr:content/translations/en.CD00001705.pdf?src-supplier=Digi-Key, ComponentLink3Description=http://www.mouser.com/ds/2/389/ts861-957384.pdf?src-supplier=Mouser, ComponentLink3URL=http://www.mouser.com/ds/2/389/ts861-957384.pdf?src-supplier=Mouser, ComponentLink4Description=https://www.verical.com/server-webapp/html/getDatasheet?partID=160028&src-supplier=Verical, ComponentLink4URL=https://www.verical.com/server-webapp/html/getDatasheet?partID=160028&src-supplier=Verical, ComponentLink5Description=http://www.produktinfo.conrad.com/datenblaetter/1100000-1199999/001185659-da-01-en-IC_COMPARATOR_R_R_TS861ILT_SOT_23_5_STM.pdf?src-supplier=Conrad, ComponentLink5URL=http://www.produktinfo.conrad.com/datenblaetter/1100000-1199999/001185659-da-01-en-IC_COMPARATOR_R_R_TS861ILT_SOT_23_5_STM.pdf?src-supplier=Conrad, Lead Free="Lead Free", Max Input Current=300pA, Mount="Surface Mount", Number of Channels=1, Number of Elements=1, Number of Pins=5, Output Current per Channel=5mA, Packaging="Tape and Reel", Power Dissipation=500mW, Pricing 1="1=0.78, 10=0.682, 25=0.6412, 100=0.486, 250=0.4136, 500=0.39292, 1000=0.29986 (USD)", Propagation Delay=2us, Radiation Hardening=No, REACH SVHC="No SVHC", Response Time=500ns, Stock 1=14868, Supplier 1=Digi-Key, Type="General Purpose"
U2: library part OPTO-ISO-3.75kV, "OPTOISO 3.75KV TRANS 4MINIFLAT", Case/Package=SMD/SMT, Collector Emitter Saturation Voltage=200mV, Collector Emitter Voltage (VCEO)=80V, Current Transfer Ratio=260%, Forward Current=50mA, Forward Voltage=1.4V, Input Current=20mA, Isolation Voltage=3.75kV, Manufacturer="Broadcom Avago", Manufacturer Part Number=HCPL-181-00BE, Max Operating Temperature=100°C, Max Power Dissipation=170mW, Min Operating Temperature=-55°C, Package Quantity=1, Reverse Breakdown Voltage=6V, Supplier Part Number 1=516-1787-6-ND, Approvals=UL,CSA,VDE, ComponentLink1Description=http://www.farnell.com/datasheets/317140.pdf?src-supplier=Farnell, ComponentLink1URL=http://www.farnell.com/datasheets/317140.pdf?src-supplier=Farnell, ComponentLink2Description=http://uk.rs-online.com/webdocs/0db8/0900766b80db8748.pdf?src-supplier=RSComponents, ComponentLink2URL=http://uk.rs-online.com/webdocs/0db8/0900766b80db8748.pdf?src-supplier=RSComponents, ComponentLink3Description=http://www1.futureelectronics.com/doc/AVAGO%20TECHNOLOGIES/HCPL-181-00BE.pdf?src-supplier=Future+Electronics, ComponentLink3URL=http://www1.futureelectronics.com/doc/AVAGO%20TECHNOLOGIES/HCPL-181-00BE.pdf?src-supplier=Future+Electronics, ComponentLink4Description=https://www.verical.com/server-webapp/html/getDatasheet?partID=142397&src-supplier=Verical, ComponentLink4URL=https://www.verical.com/server-webapp/html/getDatasheet?partID=142397&src-supplier=Verical, ComponentLink5Description=http://www.farnell.com/datasheets/317140.pdf?src-supplier=Element14, ComponentLink5URL=http://www.farnell.com/datasheets/317140.pdf?src-supplier=Element14, ComponentLink6Description=https://www.distrelec.biz/Web/Downloads/_t/ds/HCPL-181_eng_tds.pdf?mime=application%2Fpdf&src-supplier=Distrelec, ComponentLink6URL=https://www.distrelec.biz/Web/Downloads/_t/ds/HCPL-181_eng_tds.pdf?mime=application%2Fpdf&src-supplier=Distrelec, Fall Time=18000ns, Lead Free="Lead Free", Max Collector Current=50mA, Max Input Current=50mA, Max Output Voltage=80V, Mount="Surface Mount", Number of Channels=1, Number of Circuits=1, Number of Elements=1, Number of Pins=4, Output Current per Channel=50mA, Packaging="Tape and Reel", Power Dissipation=170mW, Pricing 1="1=0.56, 10=0.433, 100=0.2778, 500=0.23886, 1000=0.18443 (USD)", Radiation Hardening=No, REACH SVHC="No SVHC", Rise Time=18000ns, Stock 1=94429, Supplier 1=Digi-Key
U3: library part LDO-5V-500mA, "IC REG LINEAR 5V 500MA DPAK", Case/Package=DPAK, Dropout Voltage=230mV, Manufacturer="ON Semiconductor", Manufacturer Part Number=NCV5501DT50RKG, Max Input Voltage=16V, Max Operating Temperature=125°C, Max Output Current=500mA, Min Input Voltage=2.5V, Min Operating Temperature=-40°C, Min Output Voltage=1.25V, Output Voltage=5V, Output Voltage Accuracy=2.9%, Package Quantity=2500, Supplier Part Number 1=NCV5501DT50RKGOSDKR-ND, Accuracy=2.9%, ComponentLink1Description=https://www.verical.com/server-webapp/html/getDatasheet?partID=121510&src-supplier=Verical, ComponentLink1URL=https://www.verical.com/server-webapp/html/getDatasheet?partID=121510&src-supplier=Verical, ComponentLink2Description=http://www.onsemi.com/pub_link/Collateral/NCP5500-D.PDF?src-supplier=Future+Electronics, ComponentLink2URL=http://www.onsemi.com/pub_link/Collateral/NCP5500-D.PDF?src-supplier=Future+Electronics, ComponentLink3Description=http://www.onsemi.com/pub/Collateral/NCP5500-D.PDF?src-supplier=Avnet, ComponentLink3URL=http://www.onsemi.com/pub/Collateral/NCP5500-D.PDF?src-supplier=Avnet, ComponentLink4Description=http://www.onsemi.com/pub_link/Collateral/NCP5500-D.PDF?src-supplier=Digi-Key, ComponentLink4URL=http://www.onsemi.com/pub_link/Collateral/NCP5500-D.PDF?src-supplier=Digi-Key, Contact Plating=Tin,Matte, Height=2.38mm, Lead Free="Lead Free", Length=6.73mm, Min Current Limit=500mA, Mount="Surface Mount", Number of Outputs=1, Number of Pins=3, Number of Regulators=1, Output Current=500mA, Output Type=Fixed, Packaging="Tape and Reel", Polarity=Positive, Pricing 1="1=0.81, 10=0.71, 25=0.6676, 100=0.506, 250=0.4306, 500=0.40908, 1000=0.31219 (USD)", Radiation Hardening=No, Stock 1=2168, Supplier 1=Digi-Key, Width=6.22mm

## Via types
v1: diameter 29.53, hole 17.72, Top Layer to Bottom Layer, tented both sides, 23 vias

## Nets (pads, with @x,y where several pads share a name; then routed paths per layer and width w, separated by ;. In a path a pad name is that pad's centre, name@x,y a point inside that pad or via, vN(x,y) a via of type N, cw(c..) or ccw(c..) an arc to the next point about the centre after c; other vN are vias at no path point)
5V_TS_LED: D2.1 R7.2 | length 63.7
  Top Layer w16: D2.1 699.75,1210 699.99,1209.76 711.27,1209.76 R7.2
COMP_OUT: U1.1 U2.1 | length 230.6
  Top Layer w16: U1.1 893.42,665.63 1119.6,665.63 U2.1
D+5V_TS: "JP6 D+5V_TS.1" C1.2 R7.1 U1.4 U1.5 U3.3 | length 688.4
  Top Layer w16: R7.1 651.34,1140 C1.2 U3.3 650.53,1045.93 739.07,1045.93 v1(740,1045) ; v1(736.22,740.16) 737.2,741.14 784.45,741.14 U1.4 U1.5
  Bottom Layer w16: v1(736.22,740.16) 736.22,891.72 740,895.5 v1(740,1045)
D+12V_LV: "JP1 D+12V_LV.1" J1.5 J3.1 Q2.2 R1.2 | length 110
  Bottom Layer w16: v1(2108.5,393.5) 2163.5,393.5 v1(2218.5,393.5)
D+60V_HV: "JP4 D+60V_HV.1" F1.1 J2.2 | length 130
  Bottom Layer w16: v1(270,365) 335,365 v1(400,365)
GATE_CTRL: Q1.1 Q2.1 R1.1 R4.2 R6.1 U2.4 | length 1064
  Top Layer w16: U2.4 1490.67,664.17 1519,692.5 1519,781 1531.04,793.04 R4.2 1584.44,793.53 1642.51,793.53 R6.1 2014.72,794.02 Q1.1@2026.01,805.31 ; Q1.1@2026.01,807.82 Q1.1@2026.01,805.31 ; R1.1 2108,588.52 2108,658 2093.62,672.38 Q2.1 2026.01,672.78 Q1.1@2026.01,805.31
GATE_CTRL_LED: D1.1 R6.2 | length 59.9
  Top Layer w16: R6.2 1643.98,733.98 1701.07,733.98 D1.1
HV_GND: "JP5 HV_GND.1" C1.1 C2.2 D2.2 J2.1 R3.1 U1.2 U2.2 U3.2 | length 185.2
  Top Layer w16: C1.1@584.88,1140 C1.1 ; v1(940,560) 942.06,560 946.24,564.17 U2.2
  other v1: 421.2,50.89 621.2,50.89 821.2,50.89 321.2,250.89 521.2,250.89 721.2,250.89 921.2,250.89 821.2,450.89 121.2,650.89 221.2,850.89 121.2,1050.89 921.2,1050.89 421.2,1250.89 821.2,1250.89
HV_IN: R2.1 R3.2 U1.3 | length 156.9
  Top Layer w16: R3.2 R2.1 890,817.17 890,743.86 U1.3
LV_GND: "JP2 LV_GND.1" D1.2 J1.3 J1.4 J3.2 Q1.3 R5.1 U2.3 | length 134.2
  Top Layer w16: U2.3 1367.54,564.59 1500.59,564.59 v1(1501,565)
TS: "JP3 TS.1" C2.1 F1.2 R2.2 U3.1 | length 706.5
  Top Layer w32: U3.1 739.72,866.54 777.31,828.95 813.72,828.95 817.4,825.26 R2.2 ; U3.1@659.69,866.54 671.38,854.85 C2.1 671.38,511.38 F1.2 655,372.06 660,367.06 v1(660,365)
TSAL_GREEN-: J1.6 Q1.2 | length 1214.8
  Top Layer w16: Q1.2 2116.7,1062 2282.5,1062 2394,950.5 2394,400.5 2278.5,285 2197.6,285 J1.6
TSAL_RED+: J1.2 Q2.3 | length 541.7
  Top Layer w16: J1.2 1729.13,372.13 1760.5,403.5 1760.5,652 1780.88,672.38 Q2.3
VCU_ACTIVE: J1.1 R4.1 R5.2 | length 534.2
  Top Layer w16: R4.1 1584.44,731.52 1584.44,672.47 R5.2 1584.93,408.57 1628.5,365 1628.5,217.17 J1.1
pads on no net: MH1.1 MH2.1 MH3.1 MH4.1

## Polygon pours and split planes (outlines as drawn)
LV_GND on Top Layer "LV_GND_L01_P016" (solid, pour order 16): 2559.06,1377.95 2559.06,0 1476.38,0 1476.38,1377.95
D+12V_LV on Top Layer "D+12V_LV_L01_P014" (solid, pour order 14): 1979.5,188 1978,189.5 1978,265.5 1807.5,265.5 1792.5,280.5 1793.5,281.5 1793.5,566 2054.5,566 2075,545.5 2189.5,545.5 2197,538 2324,538 2348,514 2348,459.5 2230,341.5 2091,341.5 2078.5,329 2078.5,183.5 2059.5,164.5 2007,164.5
HV_GND on Top Layer "HV_GND_L01_P009" (solid, pour order 9): 0,0 976.38,0 976.38,1377.95 0,1377.95
D+60V_HV on Top Layer "D+60V_HV_L01_P001" (solid, pour order 1): 180,680 160,660 160,600 190,570 245,570 245,350 260.06,334.94 395,336.67 420,350 420,570 295,680
HV_GND on Bottom Layer "HV_GND_L02_P010" (solid, pour order 10): 0,1377.95 0,0 976.38,0 976.38,1377.95
LV_GND on Bottom Layer "LV_GND_L02_P013" (solid, pour order 13): 2559.06,1377.95 1476.38,1377.95 1476.38,0 2559.06,0

## Keep-outs
Keep-Out Layer:
  region: 976.38,0 976.38,1377.95 1476.38,1377.95 1476.38,0
  lines w30: 0,0 0,1377.95 2559.06,1377.95 2559.06,0 275.59,0 0,0

## Silkscreen, mask and mechanical layers (free items; w line width, h text height)
Top Overlay:
  lines w10: 975,20 975,750 ; 975,865 975,1130 ; 1245,315 1245,615 1245,900 ; 1475,15 1475,1095
  text "2" at 940,1170 h150
  text "TSAL REV 2" at 1105,1150 h35
  text "LV" at 1295,380 h50
  text "HV" at 1065.51,379.57 h50
Bottom Overlay:
  region: 1573.49,1314.52 1573.49,1314.1 1574.33,1314.1 1574.33,1313.67 1574.33,1313.25 1575.18,1313.25 1575.18,1312.82 1575.18,1312.4 1576.03,1312.4 1576.03,1311.98 1576.03,1311.55 1576.46,1311.55 1576.46,1311.13 1577.31,1311.13 1577.31,1311.55 1577.31,1311.98 1576.88,1311.98 1576.88,1312.4 1576.46,1312.4 1576.46,1312.82 1576.03,1312.82 1576.03,1313.25 1575.61,1313.25 1575.61,1313.67 1575.18,1313.67 1575.18,1314.1 1574.76,1314.1 1574.76,1314.52 1574.33,1314.52 1574.33,1314.95 1573.49,1314.95
  region: 1577.31,1310.7 1577.31,1310.28 1578.15,1310.28 1578.15,1310.7 1578.15,1311.13 1577.31,1311.13
  text "2" at 1530,1170 h150
  text "TSAL REV 2" at 1365,1150 h35
  text "HV_GND" at 465,710 h35
  text "D+12V_LV" at 2520.5,641 h35
  text "D+60V_HV" at 535,620 h35
  text "VCU_ACTIVE" at 1643.5,554 h35 r90
  text "TSAL_RED+" at 1744.5,535.5 h35 r90
  text "D+12V_LV" at 2044.5,502.5 h35 r90
  text "LV_GND" at 2510,475 h35
  text "LV_GND" at 1846,447 h35 r90
  text "LV_GND" at 1944.5,445 h35 r90
  text "TSAL_GREEN-" at 2252.5,359 h35 r90
Board Outline:
  the board outline again, w30

## Dimensions
976.38,1397.64 to 1476.38,1397.64 on Drill Guide
0,0 to 2559.06,0 on Drill Guide
0,0 to 0,1377.95 on Drill Guide